# EAGLE board tiny2313_stepper (EAGLE 5.06)
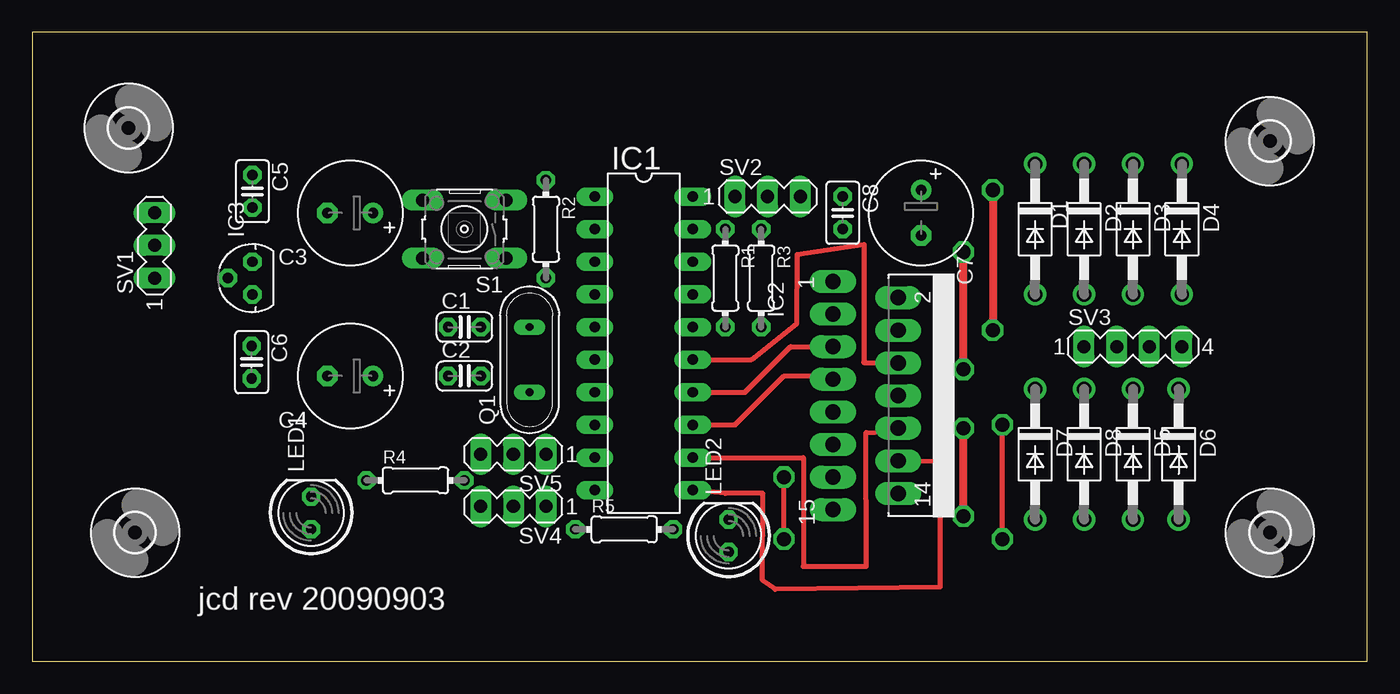
[diagram p0: board, top side]
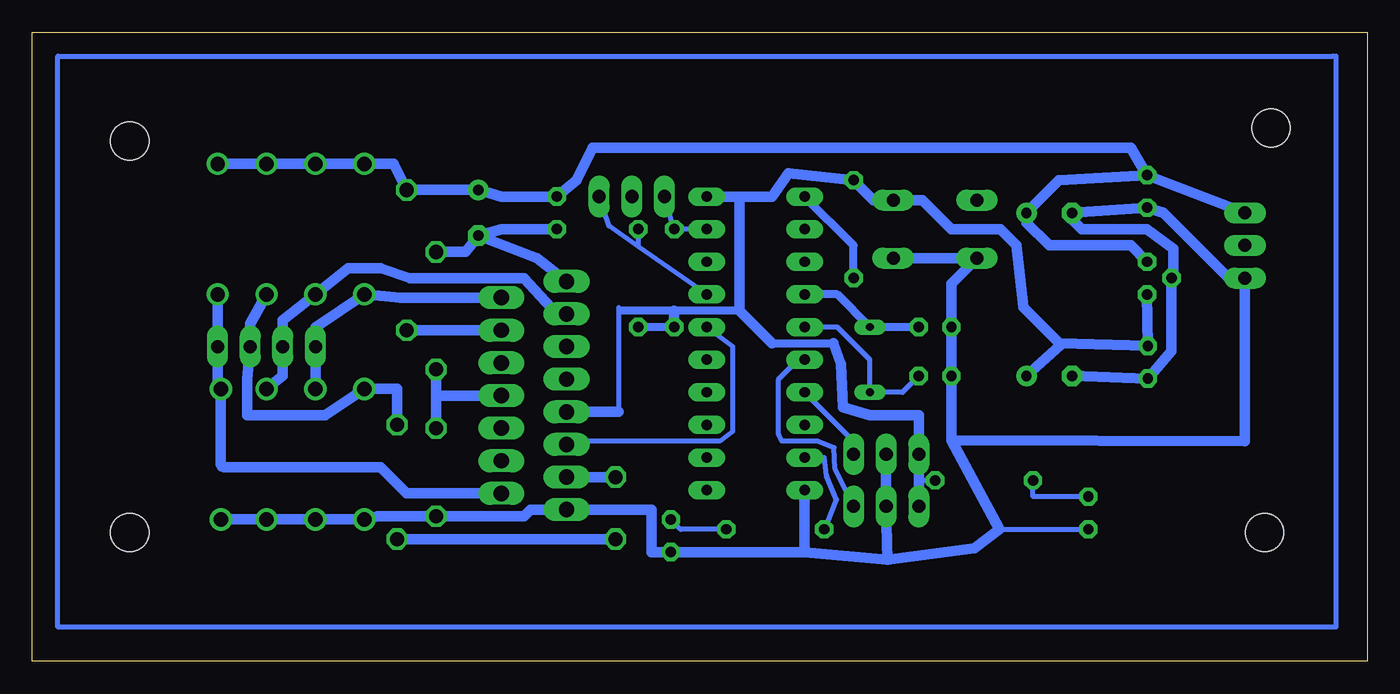
[diagram p1: board, bottom side, seen from below]

Size 104 x 49 mm. Coordinates in mm from the lower left corner, seen from the top.
Outline: 0,0 104,0 104,49 0,49 0,0
Copper layers (1*16): Top 0.035mm / dielectric 1.5mm / Bottom 0.035mm
Design rules "SparkFun": minimum track width 8mil, minimum drill 20mil, track to track 8mil, track to pad 8mil, pad to pad 8mil, via to via 8mil, smd to smd 8mil, copper to edge 10mil, drill to drill 8mil, minimum pad ring 12mil, minimum via ring 10mil, stop-mask expansion 4mil, vias tented up to drill 25mil, thermal gap 10mil

## Footprints (pad centres in the part's own frame; a part is rotated, then mirrored left to right if it is on the bottom)
C025-024X044 = drill 0.813 octagon: 1 -1.27,0; 2 1.27,0
E3,5-8 = drill 0.813 pad 1.6 round: + -1.778,0 | drill 0.813 pad 1.6 octagon: - 1.778,0
C025-025X050 = drill 0.813 octagon: 1 -1.27,0; 2 1.27,0
DO41-10 = drill 1.118 round: A 5.08,0; C -5.08,0
3,0 = hole 3: 0,0
DIL20 = drill 0.813 long: 1 -11.43,-3.81; 2 -8.89,-3.81; 3 -6.35,-3.81; 4 -3.81,-3.81; 5 -1.27,-3.81; 6 1.27,-3.81; 7 3.81,-3.81; 8 6.35,-3.81; 9 8.89,-3.81; 10 11.43,-3.81; 11 11.43,3.81; 12 8.89,3.81; 13 6.35,3.81; 14 3.81,3.81; 15 1.27,3.81; 16 -1.27,3.81; 17 -3.81,3.81; 18 -6.35,3.81; 19 -8.89,3.81; 20 -11.43,3.81
MULTIWATT-15 = drill 1.2 long: 1 -8.89,-7.62; 2 -7.62,-2.54; 3 -6.35,-7.62; 4 -5.08,-2.54; 5 -3.81,-7.62; 6 -2.54,-2.54; 7 -1.27,-7.62; 8 0,-2.54; 9 1.27,-7.62; 10 2.54,-2.54; 11 3.81,-7.62; 12 5.08,-2.54; 13 6.35,-7.62; 14 7.62,-2.54; 15 8.89,-7.62
78LXX = drill 0.813 octagon: GND 0,1.905; IN 1.27,0; OUT -1.27,0
LED5MM = drill 0.813 octagon: A -1.27,0; K 1.27,0
QS = drill 0.61 long: 1 -2.54,0; 2 2.54,0
0204/7 = drill 0.813 octagon: 1 -3.81,0; 2 3.81,0
B3F-10XX = drill 1.016 long: 1 -3.251,2.261; 2 3.251,2.261; 3 -3.251,-2.261; 4 3.251,-2.261
MA03-1 = drill 1.016 long: 1 -2.54,0; 2 0,0; 3 2.54,0
MA04-1 = drill 1.016 long: 1 -3.81,0; 2 -1.27,0; 3 1.27,0; 4 3.81,0

## Placement (x,y rotation side)
C1  22pf  [C025-024X044]  33.67,26.04 0 top
C2  22pf  [C025-024X044]  33.67,22.23 0 top
C3  470uf  [E3,5-8]  24.78,34.93 180 top
C4  470uf  [E3,5-8]  24.78,22.23 180 top
C5  0.1uf  [C025-025X050]  17.16,36.6 270 top
C6  0.1uf  [C025-025X050]  17.1,23.3 270 top
C7  470uf  [E3,5-8]  69.23,34.93 270 top
C8  0.1uf  [C025-025X050]  63.13,34.93 270 top
D1  1N4004  [DO41-10]  78.12,33.66 270 top
D2  1N4004  [DO41-10]  81.93,33.66 270 top
D3  1N4004  [DO41-10]  85.74,33.66 270 top
D4  1N4004  [DO41-10]  89.55,33.66 270 top
D5  1N4004  [DO41-10]  85.74,16.13 270 top
D6  1N4004  [DO41-10]  89.3,16.13 270 top
D7  1N4004  [DO41-10]  78.12,16.13 270 top
D8  1N4004  [DO41-10]  81.93,16.13 270 top
H1  MOUNT-HOLE3.0  [3,0]  96.41,10.04 0 top
H2  MOUNT-HOLE3.0  [3,0]  96.41,40.52 0 top
H3  MOUNT-HOLE3.0  [3,0]  8.02,10.04 0 top
H4  MOUNT-HOLE3.0  [3,0]  7.51,41.53 0 top
IC1  ATTINY2313V-10P  [DIL20]  47.64,24.77 270 top
IC2  L298  [MULTIWATT-15]  69.99,20.71 270 top
IC3  78l05  [78LXX]  17.16,29.85 90 top
LED1  [LED5MM]  21.73,11.56 90 top
LED2  [LED5MM]  54.24,9.78 90 top
Q1  16mHz  [QS]  38.75,23.5 90 top
R1  4k7  [0204/7]  53.99,29.85 270 top
R2  [0204/7]  40.02,33.66 270 top
R3  4k7  [0204/7]  56.78,29.85 270 top
R4  [0204/7]  29.86,14.1 0 top
R5  [0204/7]  46.12,10.29 0 top
S1  reset  [B3F-10XX]  33.67,33.66 180 top
SV1  +12v  [MA03-1]  9.54,32.39 90 top
SV2  i2c  [MA03-1]  57.29,36.2 0 top
SV3  Mot  [MA04-1]  85.74,24.52 0 top
SV4  home  [MA03-1]  37.48,12.07 180 top
SV5  end  [MA03-1]  37.48,16.13 180 top

## Library data of the parts
C1 C2 R1 R3 = resistor
C3-C8 R2 R4 R5 = rcl
D1-D8 = diode
H1-H4 = holes
IC1 = avr
IC2 = st-microelectronics
IC3 = v-reg
LED1 LED2 = led
Q1 = special
S1 = switch-omron
SV1-SV5 = con-lstb

## Nets
+5V: C4.+ C6.1 IC1.20 IC2.9 IC3.OUT R1.2 R2.1 R3.2 R4.2 S1.3 SV4.3 SV5.3
+12V: C3.+ C5.1 C7.+ C8.1 D1.C D2.C D3.C D4.C IC2.4 IC3.IN SV1.3
GND: C1.1 C2.1 C3.- C4.- C5.2 C6.2 C7.- C8.2 D5.A D6.A D7.A D8.A IC1.10 IC2.1 IC2.8 IC2.15 IC3.GND LED1.A LED2.A S1.1 S1.2 SV1.1 SV4.2 SV5.2
N$1: C1.2 IC1.4 Q1.2
N$2: C2.2 IC1.5 Q1.1
N$3: IC1.1 R2.2
N$4: IC1.19 R1.1 SV2.1
N$5: IC1.17 R3.1 SV2.3
N$6: IC1.6 SV4.1
N$7: IC1.16 IC2.11
N$8: IC1.15 IC2.6
N$9: IC1.14 IC2.5
N$10: IC1.13 IC2.7
N$11: IC1.12 IC2.10
N$12: IC1.11 IC2.12
N$13: IC1.7 SV5.1
N$14: D1.A D8.C IC2.2 SV3.1
N$15: D2.A D5.C IC2.3 SV3.2
N$16: D3.A D7.C IC2.13 SV3.3
N$17: D4.A D6.C IC2.14 SV3.4
N$19: LED1.K R4.1
N$20: LED2.K R5.2
N$22: IC1.9 R5.1

## Tracks (layer width: path | path; a pad name or v marks a point on that pad's centre or on a via)
+5V
  Bottom 0.203: 57.8,27.31 58.31,27.56
  Bottom 0.406: 24.02,24.77 23.89,24.64 | 58.31,27.56 58.31,19.44 | SV5.3 34.94,14.1 R4.2
  Bottom 0.61: 48.91,27.31 53.99,27.31 57.8,27.31 58.05,27.31 | 46.37,24.77 41.58,24.77 | R1.2 R3.2
  Bottom 0.813: IC3.OUT C6.1 24.02,24.77 | C4.+ 23.89,24.64 26.81,27.56 27.32,32.39 28.59,33.66 32.4,33.66 34.66,35.92 S1.3 38.47,35.92 R2.1 45.1,38 46.37,36.2 48.91,36.2 | 48.91,36.2 IC1.20 | 58.31,19.44 IC2.9 | 48.91,36.2 48.91,27.31 46.37,24.77 | SV4.3 34.94,14.1 34.94,19.18 38.75,19.18 40.83,19.81 41.01,23.13 41.58,24.77 | 53.99,27.31 R1.2
+12V  (via drill 1.1 pad 1.27)
  Top 0.61: v74.82,36.71 v74.82,25.79
  Bottom 0.406: C3.+ 26.56,34.17
  Bottom 0.813: SV1.3 C5.1 | C5.1 24.02,37.47 C3.+ | 26.56,34.17 24.78,32.39 18.43,32.39 IC3.IN | C5.1 18.43,40 60.34,40 61.61,37.47 C8.1 67.45,36.2 C7.+ v74.82,36.71 75.83,38.74 D1.C D2.C D3.C D4.C | v74.82,25.79 IC2.4
GND  (via drill 1.1 pad 1.27)
  Top 0.61: v72.53,22.74 v72.53,31.88 | v72.53,11.31 v72.53,18.17
  Bottom 0.406: SV1.1 10.81,29.85 | C3.- 23,34.42 | 15.13,30.23 IC3.GND | C1.1 C2.1 | 28.65,10.29 LED1.A
  Bottom 0.813: 10.81,29.85 15.89,34.93 C5.2 C3.- | 23,34.42 22.24,33.66 17.16,33.66 15.13,32.14 15.13,30.23 | IC3.GND 15.26,24.14 C6.2 C4.- | SV1.1 9.54,17.15 32.4,17.24 | 37.39,7.92 30.61,8.81 28.65,10.29 32.4,17.24 | 37.39,7.92 43.83,8.51 | 32.4,17.24 C1.1 32.4,29.42 S1.2 S1.1 | C8.2 67.45,33.66 C7.- | IC2.1 64.66,31.37 C7.- | 72.53,20.71 IC2.8 | 72.53,20.71 v72.53,22.74 | v72.53,31.88 70.25,31.88 C7.- | v72.53,18.17 72.53,20.71 | 43.83,8.51 LED2.A 55.77,8.51 55.77,11.82 IC2.15 65.17,11.82 65.67,11.31 v72.53,11.31 77.1,11.31 D7.A D8.A D5.A D6.A | 43.83,8.51 IC1.10 | SV5.2 SV4.2 37.39,7.92
N$1
  Bottom 0.61: IC1.4 41.29,28.58 Q1.2 C1.2
N$2
  Bottom 0.406: IC1.5 41.29,26.04 38.75,23.5 Q1.1 36.21,20.96 C2.2
N$3
  Bottom 0.61: R2.2 40.02,32.39 IC1.1
N$4
  Bottom 0.406: IC1.19 R1.1 | R1.1 SV2.1 | IC1.19 51.2,33.66 | IC1.19 R1.1
N$5
  Bottom 0.406: IC1.17 56.77,32.3 | 56.77,32.3 59.07,33.91 SV2.3 | R3.1 56.78,32.32 56.77,32.3
N$6
  Bottom 0.406: IC1.6 44.34,23.5 45.86,21.98 45.86,17.66 45.61,17.15 42.81,17.15 41.54,16.64 41.45,15 SV4.1
N$7
  Bottom 0.406: IC1.16 49.42,24.52 49.42,17.91 50.43,17.15 61.86,17.15 IC2.11
N$8
  Top 0.406: IC1.15 56.02,23.5 59.56,26.32 59.6,31.69 64.8,32.47 64.79,23.26 IC2.6
N$9
  Top 0.406: IC1.14 55.51,20.96 59.07,24.52 IC2.5
N$10
  Top 0.406: IC1.13 54.75,18.42 58.56,22.23 62.12,22.23 IC2.7
N$11
  Top 0.406: IC1.12 60.07,15.88 60.06,7.4 64.97,7.4 64.96,17.82 67.2,17.91 IC2.10
N$12
  Top 0.406: IC1.11 53.99,13.09 56.91,13.09 56.9,6.33 57.89,5.61 70.74,5.79 70.74,15.54 IC2.12
N$13
  Bottom 0.406: SV5.1 40.02,17.15 IC1.7
N$14
  Bottom 0.813: IC2.2 75.33,28.33 D1.A 81.93,26.04 SV3.1 D8.C
N$15
  Bottom 0.61: IC2.3 63.13,27.06
  Bottom 0.813: 63.13,27.06 65.67,29.85 74.56,29.85 76.85,30.61 79.39,30.61 D2.A 84.47,26.55 SV3.2 84.47,22.23 D5.C
N$16  (via drill 1.1 pad 1.27)
  Top 0.406: v58.56,9.53 v58.56,14.36 | v75.58,9.53 v75.58,18.42
  Bottom 0.813: D3.A 87.01,26.29 SV3.3 87.26,21.98 87.26,19.18 81.17,19.18 D7.C 75.58,21.21 v75.58,18.42 | v58.56,14.36 IC2.13 | v58.56,9.53 v75.58,9.53
N$17
  Bottom 0.61: 89.3,15.12 89.04,15.12 89.3,15.37
  Bottom 0.813: IC2.14 74.82,13.09 76.85,15.12 89.04,15.12 | D4.A SV3.4 89.55,21.72 D6.C 89.3,15.37
N$18
  Bottom 0.406: 2.68,47.12 102,47.12 102,2.67 2.43,2.67 2.43,47.12
N$19
  Bottom 0.406: LED1.K 26.05,12.83 R4.1
N$20
  Bottom 0.406: R5.2 53.48,10.29 LED2.K
N$22
  Bottom 0.406: IC1.9 42.31,15.88 42.13,14.46 41.34,12.61 42.05,10.8 R5.1

## Text on the board
tPlace: jcd rev 20090903